# EAGLE board blinder (EAGLE 6.2)
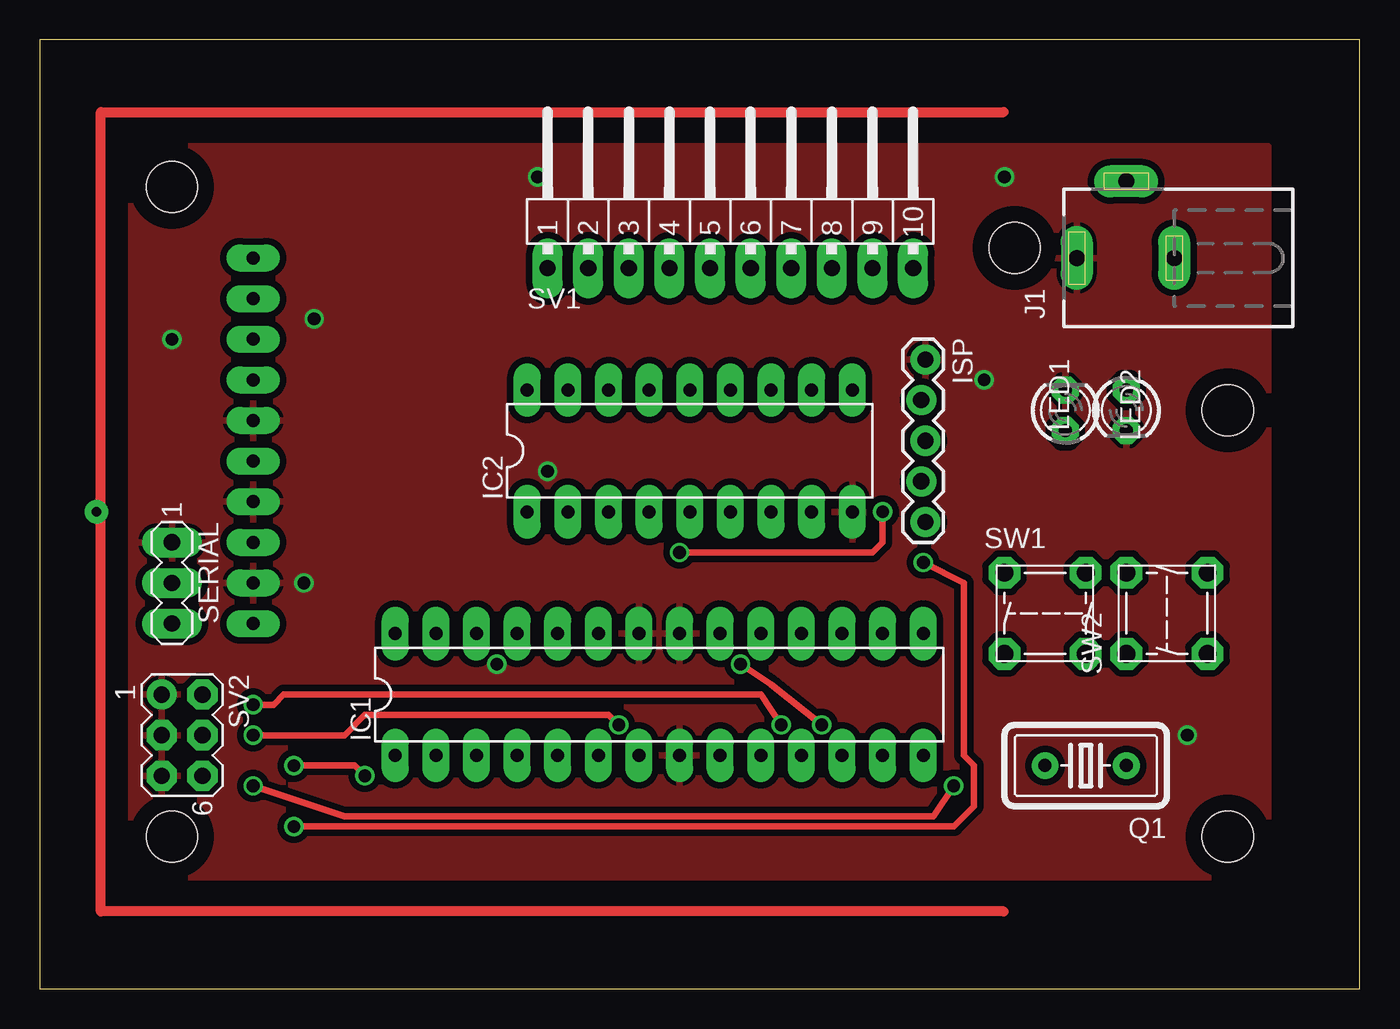
[diagram p0: board, top side]
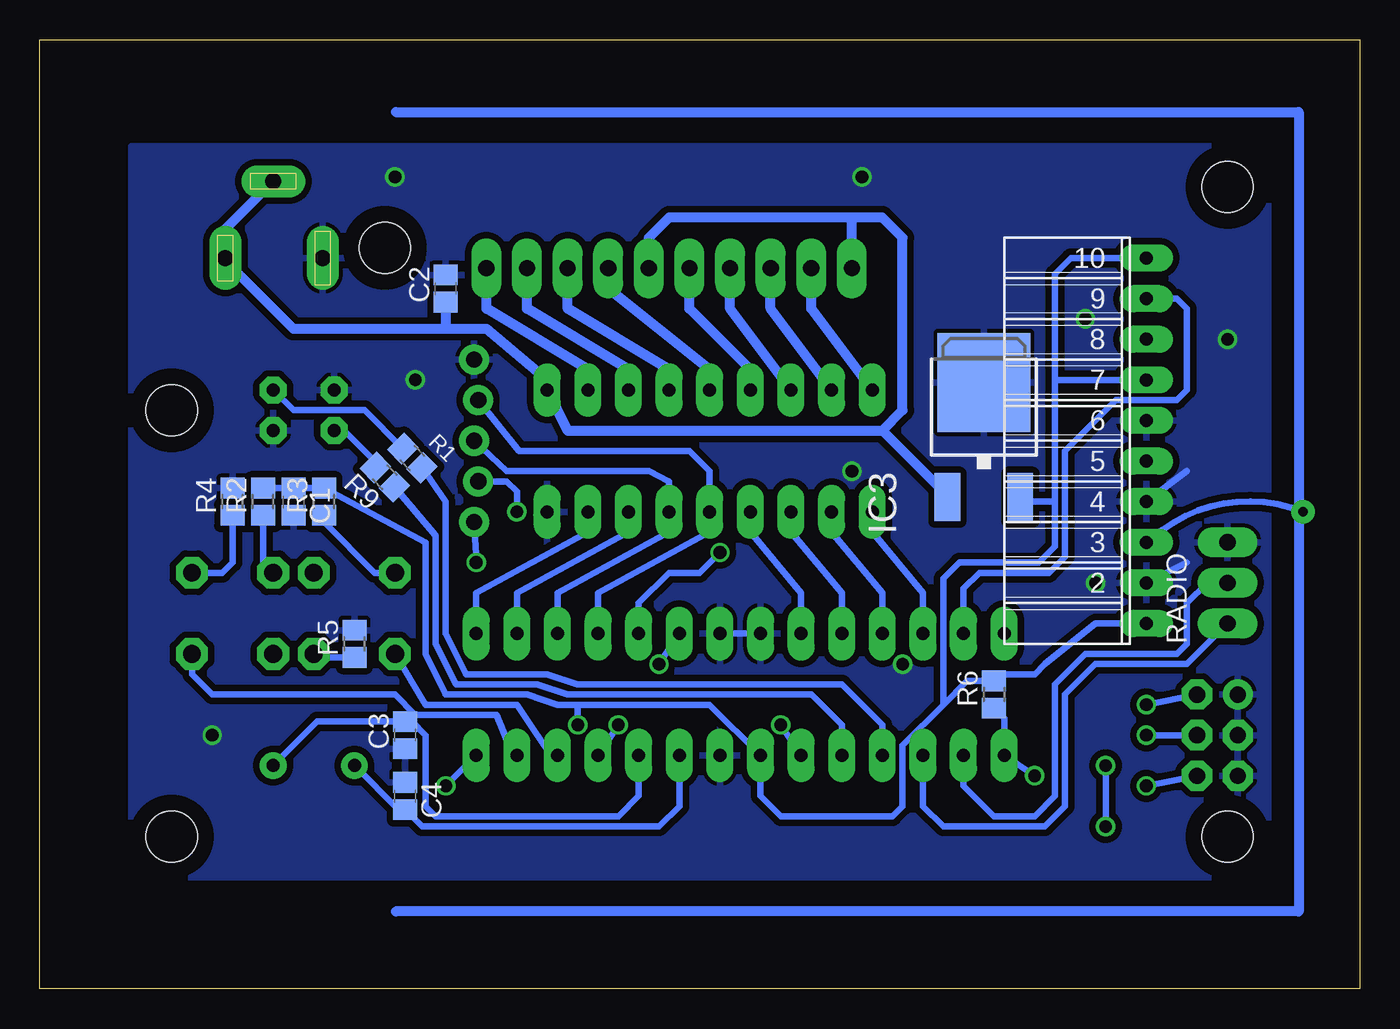
[diagram p1: board, bottom side, seen from below]

Size 82.53 x 59.36 mm. Coordinates in mm from the lower left corner, seen from the top.
Outline: 0,0 82.53,0 82.53,59.36 0,59.36 0,0
Copper layers (1*16): Top 0.035mm / dielectric 1.5mm / Bottom 0.035mm
Design rules: minimum track width 10mil, minimum drill 24mil, track to track 8mil, track to pad 8mil, pad to pad 8mil, via to via 8mil, smd to smd 8mil, copper to edge 40mil, drill to drill 8mil, minimum pad ring 17mil, minimum via ring 8mil, stop-mask expansion 4mil, vias tented up to drill 0mil, thermal gap 10mil
Holes 3.2 mm at 74.3,36.2 74.3,9.53 8.26,9.53 8.26,50.16 60.96,46.35

## Footprints (pad centres in the part's own frame; a part is rotated, then mirrored left to right if it is on the bottom)
C0805 = smd 1.3 x 1.5: 1 -0.85,0; 2 0.85,0
DIL28-3 = drill 0.813 long: 1 -16.51,-3.81; 2 -13.97,-3.81; 3 -11.43,-3.81; 4 -8.89,-3.81; 5 -6.35,-3.81; 6 -3.81,-3.81; 7 -1.27,-3.81; 8 1.27,-3.81; 9 3.81,-3.81; 10 6.35,-3.81; 11 8.89,-3.81; 12 11.43,-3.81; 13 13.97,-3.81; 14 16.51,-3.81; 15 16.51,3.81; 16 13.97,3.81; 17 11.43,3.81; 18 8.89,3.81; 19 6.35,3.81; 20 3.81,3.81; 21 1.27,3.81; 22 -1.27,3.81; 23 -3.81,3.81; 24 -6.35,3.81; 25 -8.89,3.81; 26 -11.43,3.81; 27 -13.97,3.81; 28 -16.51,3.81
DIL18 = drill 0.813 long: 1 -10.16,-3.81; 2 -7.62,-3.81; 3 -5.08,-3.81; 4 -2.54,-3.81; 5 0,-3.81; 6 2.54,-3.81; 7 5.08,-3.81; 8 7.62,-3.81; 9 10.16,-3.81; 10 10.16,3.81; 11 7.62,3.81; 12 5.08,3.81; 13 2.54,3.81; 14 0,3.81; 15 -2.54,3.81; 16 -5.08,3.81; 17 -7.62,3.81; 18 -10.16,3.81
DPACK = smd 1.6 x 3: 1 -2.28,-4.8; 3 2.28,-4.8 | smd 5.8 x 6.2: 4 0,2.38
1X05_LOCK = drill 1.016 pad 1.88: 1 0,0.127; 2 2.54,-0.127; 3 5.08,0.127; 4 7.62,-0.127; 5 10.16,0.127
DCJ0202 = drill 1 pad 2 long: 1 0,3.1; 2 4.8,0; 3 0,-3
LED3MM = drill 0.813 octagon: A -1.27,0; K 1.27,0
HC18U-V = drill 0.813: 1 -2.54,0; 2 2.54,0
R0805 = smd 1.3 x 1.5: 1 -0.85,0; 2 0.85,0
FE10W = drill 0.813 long: 1 -11.43,0; 2 -8.89,0; 3 -6.35,0; 4 -3.81,0; 5 -1.27,0; 6 1.27,0; 7 3.81,0; 8 6.35,0; 9 8.89,0; 10 11.43,0
MA03-1 = drill 1.016 long: 1 -2.54,0; 2 0,0; 3 2.54,0
MA10-1W = drill 1.016 long: 1 -11.43,0; 2 -8.89,0; 3 -6.35,0; 4 -3.81,0; 5 -1.27,0; 6 1.27,0; 7 3.81,0; 8 6.35,0; 9 8.89,0; 10 11.43,0
MA03-2 = drill 1.016: 1 -2.54,-1.27 | drill 1.016 octagon: 2 -2.54,1.27; 3 0,-1.27; 4 0,1.27; 5 2.54,-1.27; 6 2.54,1.27
TS = drill 1.118 octagon: 1 -2.54,2.54; 2 2.54,2.54; 3 2.54,-2.54; 4 -2.54,-2.54
DIPOLEHALF443.95_50 = drill 0.6: FEED 0,0.27

## Placement (x,y rotation side)
C1  100n  [C0805]  66.67,30.48 270 bottom
C2  470n  [C0805]  57.15,43.81 90 bottom
C3  22p  [C0805]  59.69,15.88 90 bottom
C4  22p  [C0805]  59.69,12.07 270 bottom
IC1  ATMEGA328PU  [DIL28-3]  38.73,18.41 0 top
IC2  ULN2803AFWG  [DIL18]  40.64,33.65 0 top
IC3  78M05SMD  [DPACK]  23.49,35.56 0 bottom
ISP  [1X05_LOCK]  55.24,39.37 270 top
J1  DCJ0202  [DCJ0202]  67.94,45.72 90 top
LED1  [LED3MM]  67.94,36.2 270 top
LED2  [LED3MM]  64.14,36.2 90 top
Q1  16M  [HC18U-V]  65.41,13.97 180 top
R1  1k  [R0805]  59.24,33.21 135 bottom
R2  2k  [R0805]  68.58,30.48 90 bottom
R3  2k  [R0805]  64.77,30.48 90 bottom
R4  10k  [R0805]  70.48,30.48 90 bottom
R5  10k  [R0805]  62.86,21.59 90 bottom
R6  10k  [R0805]  22.86,18.41 90 bottom
R9  1k  [R0805]  60.96,32.01 135 bottom
RADIO  [FE10W]  13.34,34.29 90 bottom
SERIAL  [MA03-1]  8.26,25.4 270 top
SV1  Motors  [MA10-1W]  43.18,45.08 0 top
SV2  [MA03-2]  8.89,15.88 270 top
SW1  TS  [TS]  62.86,23.5 0 top
SW2  TS  [TS]  70.48,23.5 90 top
U$1  ANT44350H  [DIPOLEHALF443.95_50]  3.81,29.84 270 bottom
U$2  ANT44350H  [DIPOLEHALF443.95_50]  3.81,29.84 90 top

## Library data of the parts
C1-C4 R1-R6 R9 = resistor
IC1-IC3 SW1 SW2 U$1 U$2 = flux
ISP = SparkFun
J1 = con-jack; OC_FARNELL: unknown; OC_NEWARK: unknown
LED1 LED2 = led
Q1 = crystal; OC_FARNELL: unknown; OC_NEWARK: unknown
RADIO = con-lsta; OC_FARNELL: unknown; OC_NEWARK: unknown
SERIAL SV1 SV2 = con-lstb; OC_FARNELL: unknown; OC_NEWARK: unknown

## Nets
+12V: C2.1 IC2.10 IC3.1 J1.2 J1.3 SV1.1 SV1.6
ANTENNA: RADIO.3 U$1.FEED U$2.FEED
DEBUG0: IC1.14 SV2.6
DEBUG1: IC1.6 SV2.4
DEBUG2: IC1.11 SV2.2
GND: C1.2 C2.2 C3.1 C4.1 IC1.8 IC1.21 IC1.22 IC2.9 IC3.4 ISP.1 J1.1 LED1.K LED2.K R4.2 R5.2 RADIO.2 RADIO.4 RADIO.6 SERIAL.1 SV2.1 SV2.3 SV2.5
LED1: IC1.4 R1.1
LED2: IC1.5 R9.1
MISO/MOT3: IC1.18 IC2.5 ISP.2
MOSI/MOT2: IC1.17 IC2.6 ISP.3
MOT0: IC1.15 IC2.8
MOT0_12: IC2.11 SV1.10
MOT1: IC1.16 IC2.7
MOT1_12: IC2.12 SV1.9
MOT2_12: IC2.13 SV1.8
MOT3_12: IC2.14 SV1.7
MOT4: IC1.23 IC2.4
MOT4_12: IC2.15 SV1.5
MOT5: IC1.24 IC2.3
MOT5_12: IC2.16 SV1.4
MOT6: IC1.25 IC2.2
MOT6_12: IC2.17 SV1.3
MOT7: IC1.26 IC2.1
MOT7_12: IC2.18 SV1.2
N$1: LED1.A R1.2
N$2: LED2.A R9.2
N$7: R5.1 SW1.3
N$8: R4.1 SW2.3
N$9: R3.1 SW1.1
N$10: R2.1 SW2.2
RADIO_RX: IC1.27 RADIO.9
RESET: IC1.1 ISP.5 R6.1
RX: IC1.2 SERIAL.2
SCK: IC1.19 ISP.4
SW1: IC1.12 SW1.4
SW2: IC1.13 SW2.4
TP: RADIO.8
TX: IC1.3 SERIAL.3
VCC: C1.1 IC1.7 IC1.20 IC3.3 R2.2 R3.2 R6.2 RADIO.1 RADIO.7 RADIO.10
XTAL1: C4.2 IC1.9 Q1.2
XTAL2: C3.2 IC1.10 Q1.1

## Tracks (layer width: path | path; a pad name or v marks a point on that pad's centre or on a via)
+12V
  Bottom 0.406: 70.48,45.08 J1.3 | IC3.1 25.77,30.86
  Bottom 0.61: 29.84,34.92 49.53,34.92 IC2.10 50.8,38.1 54.61,41.27 57.15,41.27 | 29.84,34.92 28.57,36.2 28.57,46.99 29.84,48.26 31.75,48.26 | 70.48,45.08 66.67,41.27 57.15,41.27 | SV1.6 44.45,46.99 43.18,48.26 31.75,48.26 | J1.3 70.94,47.52 J1.2 | 25.77,30.86 29.84,34.92 | SV1.1 31.75,48.26 | C2.1 57.15,41.27
ANTENNA
  Bottom 0.406: RADIO.3 12.32,28.7 arc59 U$2.FEED
DEBUG0  (via drill 0.8)
  Top 0.406: v13.34,12.7 19.05,10.79 55.88,10.79 v57.15,12.7
  Bottom 0.406: v57.15,12.7 IC1.14 | SV2.6 v13.34,12.7
DEBUG1  (via drill 0.8)
  Top 0.406: v13.34,15.88 19.05,15.88 20.32,17.14 35.56,17.14 v36.2,16.51
  Bottom 0.406: v36.2,16.51 IC1.6 | SV2.4 v13.34,15.88
DEBUG2  (via drill 0.8)
  Top 0.406: v13.34,17.78 14.61,17.78 15.24,18.41 45.09,18.41 v46.35,16.51
  Bottom 0.406: v46.35,16.51 IC1.11 | SV2.2 v13.34,17.78
GND  (via drill 0.8)
  Bottom 0.406: RADIO.2 10.79,26.67 | RADIO.4 10.79,32.38 | IC1.22 IC1.21
  other vias: 71.75,15.88 31.12,50.8 60.32,50.8 28.57,20.32 16.51,25.4 8.26,40.64 31.75,32.38 17.14,41.91 59.05,38.1
  pour Bottom (isolate 0.406): 5.71,52.7 76.83,52.7 76.83,6.99 5.71,6.99
  pour Top (isolate 0.406): 5.71,52.7 76.83,52.7 76.83,6.99 5.71,6.99
LED1
  Bottom 0.406: IC1.4 29.84,16.51 32.38,19.05 48.89,19.05 50.8,19.68 55.88,19.68 57.15,22.23 57.15,30.48 R1.1
LED2
  Bottom 0.406: IC1.5 32.38,16.51 34.29,18.41 49.53,18.41 51.44,19.05 56.52,19.05 57.78,21.59 57.78,28.36 R9.1
MISO/MOT3
  Bottom 0.406: IC1.18 47.62,24.77 40.64,28.57 IC2.5 40.64,32.38 41.91,33.65 52.58,33.65 ISP.2
MOSI/MOT2
  Bottom 0.406: IC1.17 50.16,24.77 43.18,28.57 IC2.6 43.18,31.75 44.45,32.38 53.34,32.38 ISP.3
MOT0
  Bottom 0.406: IC1.15 55.24,24.77 48.26,28.57 IC2.8
MOT0_12
  Bottom 0.61: IC2.11 48.26,38.73 54.61,42.54 SV1.10
MOT1
  Bottom 0.406: IC2.7 45.72,28.57 52.7,24.77 IC1.16
MOT1_12
  Bottom 0.61: IC2.12 45.72,38.73 52.07,42.54 SV1.9
MOT2_12
  Bottom 0.61: IC2.13 43.18,38.73 49.53,42.54 SV1.8
MOT3_12
  Bottom 0.61: IC2.14 40.64,38.73 46.99,43.81 SV1.7
MOT4
  Bottom 0.406: IC1.23 34.92,24.77 38.1,28.57 IC2.4
MOT4_12
  Bottom 0.61: IC2.15 38.1,38.73 41.91,42.54 SV1.5
MOT5
  Bottom 0.406: IC1.24 32.38,24.77 35.56,28.57 IC2.3
MOT5_12
  Bottom 0.61: IC2.16 39.37,42.54 SV1.4
MOT6
  Bottom 0.406: IC1.25 29.84,24.77 33.02,28.57 IC2.2
MOT6_12
  Bottom 0.61: IC2.17 36.83,42.54 SV1.3
MOT7
  Bottom 0.406: IC1.26 27.3,24.77 30.48,28.57 IC2.1
MOT7_12
  Bottom 0.61: IC2.18 34.29,42.54 SV1.2
N$1
  Bottom 0.406: R1.2 | R1.2 62.23,36.2 66.67,36.2 LED1.A
N$2
  Bottom 0.406: R9.2 61.56,32.99 63.5,34.92 LED2.A
N$7
  Bottom 0.406: SW1.3 65.19,20.74 R5.1
N$8
  Bottom 0.406: R4.1 70.48,26.67 71.12,26.04 SW2.3
N$9
  Bottom 0.406: R3.1 64.77,29.21 61.59,26.04 SW1.1
N$10
  Bottom 0.406: R2.1 68.58,26.67 SW2.2
RADIO_RX
  Bottom 0.406: RADIO.9 11.43,43.18 10.79,42.54 10.79,37.46 11.43,36.83 15.24,36.83 18.41,33.65 18.41,27.04 19.41,26.04 23.77,26.04 24.77,25.04 IC1.27
RESET  (via drill 0.8)
  Top 0.406: v55.24,26.67 57.78,25.4 57.78,14.61 58.42,13.97 58.42,11.43 57.15,10.16 v15.88,10.16 | v15.88,13.97 19.68,13.97 v20.32,13.34
  Bottom 0.406: R6.1 22.22,16.93 IC1.1 v20.32,13.34 | ISP.5 55.24,27.18 v55.24,26.67 | v15.88,10.16 v15.88,13.97
RX
  Bottom 0.406: IC1.2 24.77,12.7 22.86,10.79 20.32,10.79 19.05,12.07 19.05,19.05 17.14,20.96 11.43,20.96 10.79,21.59 10.79,24.13 9.53,25.4 SERIAL.2
SCK  (via drill 0.8)
  Top 0.406: v52.7,29.84 52.7,27.94 52.07,27.3 v40,27.3
  Bottom 0.406: IC1.19 45.09,24.13 43.18,26.04 41.27,26.04 v40,27.3 | ISP.4 53.34,31.75 52.7,31.11 v52.7,29.84
SW1
  Bottom 0.406: SW1.4 58.42,17.78 52.7,17.78 50.16,13.97 IC1.12
SW2
  Bottom 0.406: IC1.13 52.7,13.97 53.98,17.14 59.05,17.14 60.32,18.41 71.75,18.41 73.03,19.68 SW2.4
TX
  Bottom 0.406: IC1.3 27.3,11.43 26.04,10.16 19.68,10.16 18.41,11.43 18.41,18.41 16.51,20.32 10.79,20.32 SERIAL.3
VCC  (via drill 0.8)
  Top 0.406: v43.81,20.32 45.72,19.05 v48.89,16.51
  Bottom 0.406: RADIO.7 19.05,38.1 | 26.04,17.78 28.57,15.24 28.57,11.43 29.21,10.79 36.2,10.79 37.46,12.07 IC1.7 40.64,17.78 48.89,17.78 | 26.04,17.78 24.55,19.27 R6.2 22.86,19.68 20.32,19.68 19.68,20.32 16.51,22.86 RADIO.1 | R2.2 C1.1 R3.2 58.42,27.94 58.42,20.96 57.15,18.41 52.07,18.41 50.16,17.78 48.89,17.78 | IC1.20 v43.81,20.32 | v48.89,16.51 48.89,17.78 | 26.04,17.78 26.04,25.67 25.04,26.67 20.05,26.67 19.05,27.67 19.05,30.48 | 19.05,30.48 19.05,38.1 | 19.05,38.1 19.05,44.72 18.05,45.72 RADIO.10 | IC3.3 20.95,30.5 20.95,30.48 19.05,30.48
XTAL1
  Bottom 0.406: IC1.9 42.55,11.43 43.81,10.16 58.63,10.16 C4.2 60.11,11.21 Q1.2
XTAL2
  Bottom 0.406: IC1.10 45.09,12.07 46.35,10.79 57.78,10.79 58.42,11.43 58.42,15.88 59.27,16.73 C3.2 65.19,16.73 Q1.1

## Text on the board
Reference: GND|RX|TX